# EAGLE board multimax_super (EAGLE 6.0)

Size 99.06 x 81.28 mm. Coordinates in mm from the lower left corner, seen from the top.
Outline: 0,81.27 99.06,81.28 99.06,0 81.28,0
Outline: 0,81.27 0,0 81.28,0
Outline: 0,81.27 0,81.28 81.28,81.28 81.28,0
Copper layers (1*16): Top 0.035mm / dielectric 1.5mm / Bottom 0.035mm
Design rules: minimum track width 10mil, minimum drill 24mil, track to track 8mil, track to pad 8mil, pad to pad 8mil, via to via 8mil, smd to smd 8mil, copper to edge 40mil, drill to drill 8mil, minimum pad ring 10mil, minimum via ring 8mil, stop-mask expansion 4mil, vias tented up to drill 0mil, thermal gap 10mil
Holes 3.2 mm at 5.08,5.08 5.08,76.2 76.2,5.08 76.2,76.2

## Footprints (pad centres in the part's own frame; a part is rotated, then mirrored left to right if it is on the bottom)
LED3MM = drill 0.813 pad 1.88: A -1.27,0; K 1.27,0
CAP-PTH-SMALL-KIT = drill 1.016 pad 2.032: 1 -1.397,0; 2 1.397,0
1X01 = drill 1.016 pad 1.88: 1 0,0
TQFP32-08 = smd 1.27 x 0.559: 1 -4.293,2.8; 2 -4.293,2; 3 -4.293,1.2; 4 -4.293,0.4; 5 -4.293,-0.4; 6 -4.293,-1.2; 7 -4.293,-2; 8 -4.293,-2.8; 17 4.293,-2.8; 18 4.293,-2; 19 4.293,-1.2; 20 4.293,-0.4; 21 4.293,0.4; 22 4.293,1.2; 23 4.293,2; 24 4.293,2.8 | smd 0.559 x 1.27: 9 -2.8,-4.293; 10 -2,-4.293; 11 -1.2,-4.293; 12 -0.4,-4.293; 13 0.4,-4.293; 14 1.2,-4.293; 15 2,-4.293; 16 2.8,-4.293; 25 2.8,4.293; 26 2,4.293; 27 1.2,4.293; 28 0.4,4.293; 29 -0.4,4.293; 30 -1.2,4.293; 31 -2,4.293; 32 -2.8,4.293
2X3-NS = drill 1.016 pad 1.88 square: 1 -2.54,-1.27 | drill 1.016 pad 1.88 octagon: 2 -2.54,1.27; 3 0,-1.27; 4 0,1.27; 5 2.54,-1.27; 6 2.54,1.27
1X04 = drill 1.016 pad 1.88 square: 1 0,0 | drill 1.016 pad 1.88: 2 2.54,0; 3 5.08,0; 4 7.62,0
1X17 = drill 1.016 pad 1.88: 1 0,0; 2 2.54,0; 3 5.08,0; 4 7.62,0; 5 10.16,0; 6 12.7,0; 7 15.24,0; 8 17.78,0; 9 20.32,0; 10 22.86,0; 11 25.4,0; 12 27.94,0; 13 30.48,0; 14 33.02,0; 15 35.56,0; 16 38.1,0; 17 40.64,0
R-7 = drill 0.6 pad 1.27: P$1 -3.25,0; P$2 3.25,0
D-7.5 = drill 0.813: A 2.81,0; C -3,0
USB-MINIB = smd 2.5 x 0.5: D+ 2.5,0; D- 2.5,0.8; GND 2.5,-1.6; ID 2.5,-0.8; VBUS 2.5,1.6 | smd 2.5 x 2: MTN1 -3,4.5; MTN2 2.5,4.5; MTN3 -3,-4.5; MTN4 2.5,-4.5 | hole 0.9: 0,2.2; 0,-2.2
NICHICON_10X30 = drill 1.2 pad 2.54 octagon: P$1 3.23,-1.75 | drill 1.2 pad 2.54: P$2 8.77,-1.75
SWITCH2 = drill 0.6: 1 -0.02,1.94; 2 -0.02,-0.06; 3 -0.02,-2.06 | drill 1.2 square: C1 -0.02,4.19; C2 -0.02,-4.31

## Placement (x,y rotation side)
00  [LED3MM]  2.54,2.54 45 top
0A  [LED3MM]  53.34,2.54 45 top
0B  [LED3MM]  58.42,2.54 45 top
0C  [LED3MM]  63.5,2.54 45 top
0D  [LED3MM]  68.58,2.54 45 top
0E  [LED3MM]  73.66,2.54 45 top
0F  [LED3MM]  78.74,2.54 45 top
01  [LED3MM]  7.62,2.54 45 top
1A  [LED3MM]  53.34,7.62 45 top
1B  [LED3MM]  58.42,7.62 45 top
1C  [LED3MM]  63.5,7.62 45 top
1D  [LED3MM]  68.58,7.62 45 top
1E  [LED3MM]  73.66,7.62 45 top
1F  [LED3MM]  78.74,7.62 45 top
02  [LED3MM]  12.7,2.54 45 top
2A  [LED3MM]  53.34,12.7 45 top
2B  [LED3MM]  58.42,12.7 45 top
2C  [LED3MM]  63.5,12.7 45 top
2D  [LED3MM]  68.58,12.7 45 top
2E  [LED3MM]  73.66,12.7 45 top
2F  [LED3MM]  78.74,12.7 45 top
03  [LED3MM]  17.78,2.54 45 top
3A  [LED3MM]  53.34,17.78 45 top
3B  [LED3MM]  58.42,17.78 45 top
3C  [LED3MM]  63.5,17.78 45 top
3D  [LED3MM]  68.58,17.78 45 top
3E  [LED3MM]  73.66,17.78 45 top
3F  [LED3MM]  78.74,17.78 45 top
04  [LED3MM]  22.86,2.54 45 top
4A  [LED3MM]  53.34,22.86 45 top
4B  [LED3MM]  58.42,22.86 45 top
4C  [LED3MM]  63.5,22.86 45 top
4D  [LED3MM]  68.58,22.86 45 top
4E  [LED3MM]  73.66,22.86 45 top
4F  [LED3MM]  78.74,22.86 45 top
05  [LED3MM]  27.94,2.54 45 top
5A  [LED3MM]  53.34,27.94 45 top
5B  [LED3MM]  58.42,27.94 45 top
5C  [LED3MM]  63.5,27.94 45 top
5D  [LED3MM]  68.58,27.94 45 top
5E  [LED3MM]  73.66,27.94 45 top
5F  [LED3MM]  78.74,27.94 45 top
06  [LED3MM]  33.02,2.54 45 top
6A  [LED3MM]  53.34,33.02 45 top
6B  [LED3MM]  58.42,33.02 45 top
6C  [LED3MM]  63.5,33.02 45 top
6D  [LED3MM]  68.58,33.02 45 top
6E  [LED3MM]  73.66,33.02 45 top
6F  [LED3MM]  78.74,33.02 45 top
07  [LED3MM]  38.1,2.54 45 top
7A  [LED3MM]  53.34,38.1 45 top
7B  [LED3MM]  58.42,38.1 45 top
7C  [LED3MM]  63.5,38.1 45 top
7D  [LED3MM]  68.58,38.1 45 top
7E  [LED3MM]  73.66,38.1 45 top
7F  [LED3MM]  78.74,38.1 45 top
08  [LED3MM]  43.18,2.54 45 top
8A  [LED3MM]  53.34,43.18 45 top
8B  [LED3MM]  58.42,43.18 45 top
8C  [LED3MM]  63.5,43.18 45 top
8D  [LED3MM]  68.58,43.18 45 top
8E  [LED3MM]  73.66,43.18 45 top
8F  [LED3MM]  78.74,43.18 45 top
09  [LED3MM]  48.26,2.54 45 top
9A  [LED3MM]  53.34,48.26 45 top
9B  [LED3MM]  58.42,48.26 45 top
9C  [LED3MM]  63.5,48.26 45 top
9D  [LED3MM]  68.58,48.26 45 top
9E  [LED3MM]  73.66,48.26 45 top
9F  [LED3MM]  78.74,48.26 45 top
10  [LED3MM]  2.54,7.62 45 top
11  [LED3MM]  7.62,7.62 45 top
12  [LED3MM]  12.7,7.62 45 top
13  [LED3MM]  17.78,7.62 45 top
14  [LED3MM]  22.86,7.62 45 top
15  [LED3MM]  27.94,7.62 45 top
16  [LED3MM]  33.02,7.62 45 top
17  [LED3MM]  38.1,7.62 45 top
18  [LED3MM]  43.18,7.62 45 top
19  [LED3MM]  48.26,7.62 45 top
20  [LED3MM]  2.54,12.7 45 top
21  [LED3MM]  7.62,12.7 45 top
22  [LED3MM]  12.7,12.7 45 top
23  [LED3MM]  17.78,12.7 45 top
24  [LED3MM]  22.86,12.7 45 top
25  [LED3MM]  27.94,12.7 45 top
26  [LED3MM]  33.02,12.7 45 top
27  [LED3MM]  38.1,12.7 45 top
28  [LED3MM]  43.18,12.7 45 top
29  [LED3MM]  48.26,12.7 45 top
30  [LED3MM]  2.54,17.78 45 top
31  [LED3MM]  7.62,17.78 45 top
32  [LED3MM]  12.7,17.78 45 top
33  [LED3MM]  17.78,17.78 45 top
34  [LED3MM]  22.86,17.78 45 top
35  [LED3MM]  27.94,17.78 45 top
36  [LED3MM]  33.02,17.78 45 top
37  [LED3MM]  38.1,17.78 45 top
38  [LED3MM]  43.18,17.78 45 top
39  [LED3MM]  48.26,17.78 45 top
40  [LED3MM]  2.54,22.86 45 top
41  [LED3MM]  7.62,22.86 45 top
42  [LED3MM]  12.7,22.86 45 top
43  [LED3MM]  17.78,22.86 45 top
44  [LED3MM]  22.86,22.86 45 top
45  [LED3MM]  27.94,22.86 45 top
46  [LED3MM]  33.02,22.86 45 top
47  [LED3MM]  38.1,22.86 45 top
48  [LED3MM]  43.18,22.86 45 top
49  [LED3MM]  48.26,22.86 45 top
50  [LED3MM]  2.54,27.94 45 top
51  [LED3MM]  7.62,27.94 45 top
52  [LED3MM]  12.7,27.94 45 top
53  [LED3MM]  17.78,27.94 45 top
54  [LED3MM]  22.86,27.94 45 top
55  [LED3MM]  27.94,27.94 45 top
56  [LED3MM]  33.02,27.94 45 top
57  [LED3MM]  38.1,27.94 45 top
58  [LED3MM]  43.18,27.94 45 top
59  [LED3MM]  48.26,27.94 45 top
60  [LED3MM]  2.54,33.02 45 top
61  [LED3MM]  7.62,33.02 45 top
62  [LED3MM]  12.7,33.02 45 top
63  [LED3MM]  17.78,33.02 45 top
64  [LED3MM]  22.86,33.02 45 top
65  [LED3MM]  27.94,33.02 45 top
66  [LED3MM]  33.02,33.02 45 top
67  [LED3MM]  38.1,33.02 45 top
68  [LED3MM]  43.18,33.02 45 top
69  [LED3MM]  48.26,33.02 45 top
70  [LED3MM]  2.54,38.1 45 top
71  [LED3MM]  7.62,38.1 45 top
72  [LED3MM]  12.7,38.1 45 top
73  [LED3MM]  17.78,38.1 45 top
74  [LED3MM]  22.86,38.1 45 top
75  [LED3MM]  27.94,38.1 45 top
76  [LED3MM]  33.02,38.1 45 top
77  [LED3MM]  38.1,38.1 45 top
78  [LED3MM]  43.18,38.1 45 top
79  [LED3MM]  48.26,38.1 45 top
80  [LED3MM]  2.54,43.18 45 top
81  [LED3MM]  7.62,43.18 45 top
82  [LED3MM]  12.7,43.18 45 top
83  [LED3MM]  17.78,43.18 45 top
84  [LED3MM]  22.86,43.18 45 top
85  [LED3MM]  27.94,43.18 45 top
86  [LED3MM]  33.02,43.18 45 top
87  [LED3MM]  38.1,43.18 45 top
88  [LED3MM]  43.18,43.18 45 top
89  [LED3MM]  48.26,43.18 45 top
90  [LED3MM]  2.54,48.26 45 top
91  [LED3MM]  7.62,48.26 45 top
92  [LED3MM]  12.7,48.26 45 top
93  [LED3MM]  17.78,48.26 45 top
94  [LED3MM]  22.86,48.26 45 top
95  [LED3MM]  27.94,48.26 45 top
96  [LED3MM]  33.02,48.26 45 top
97  [LED3MM]  38.1,48.26 45 top
98  [LED3MM]  43.18,48.26 45 top
99  [LED3MM]  48.26,48.26 45 top
A0  [LED3MM]  2.54,53.34 45 top
A1  [LED3MM]  7.62,53.34 45 top
A2  [LED3MM]  12.7,53.34 45 top
A3  [LED3MM]  17.78,53.34 45 top
A4  [LED3MM]  22.86,53.34 45 top
A5  [LED3MM]  27.94,53.34 45 top
A6  [LED3MM]  33.02,53.34 45 top
A7  [LED3MM]  38.1,53.34 45 top
A8  [LED3MM]  43.18,53.34 45 top
A9  [LED3MM]  48.26,53.34 45 top
AA  [LED3MM]  53.34,53.34 45 top
AB  [LED3MM]  58.42,53.34 45 top
AC  [LED3MM]  63.5,53.34 45 top
AD  [LED3MM]  68.58,53.34 45 top
AE  [LED3MM]  73.66,53.34 45 top
AF  [LED3MM]  78.74,53.34 45 top
B0  [LED3MM]  2.54,58.42 45 top
B1  [LED3MM]  7.62,58.42 45 top
B2  [LED3MM]  12.7,58.42 45 top
B3  [LED3MM]  17.78,58.42 45 top
B4  [LED3MM]  22.86,58.42 45 top
B5  [LED3MM]  27.94,58.42 45 top
B6  [LED3MM]  33.02,58.42 45 top
B7  [LED3MM]  38.1,58.42 45 top
B8  [LED3MM]  43.18,58.42 45 top
B9  [LED3MM]  48.26,58.42 45 top
BA  [LED3MM]  53.34,58.42 45 top
BB  [LED3MM]  58.42,58.42 45 top
BC  [LED3MM]  63.5,58.42 45 top
BD  [LED3MM]  68.58,58.42 45 top
BE  [LED3MM]  73.66,58.42 45 top
BF  [LED3MM]  78.74,58.42 45 top
C0  [LED3MM]  2.54,63.5 45 top
C1  [LED3MM]  7.62,63.5 45 top
C2  [LED3MM]  12.7,63.5 45 top
C3  [LED3MM]  17.78,63.5 45 top
C4  [LED3MM]  22.86,63.5 45 top
C5  [LED3MM]  27.94,63.5 45 top
C6  [LED3MM]  33.02,63.5 45 top
C7  [LED3MM]  38.1,63.5 45 top
C8  [LED3MM]  43.18,63.5 45 top
C9  [LED3MM]  48.26,63.5 45 top
CA  [LED3MM]  53.34,63.5 45 top
CB  [LED3MM]  58.42,63.5 45 top
CC  [LED3MM]  63.5,63.5 45 top
CD  [LED3MM]  68.58,63.5 45 top
CE  [LED3MM]  73.66,63.5 45 top
CF  [LED3MM]  78.74,63.5 45 top
CP1  [CAP-PTH-SMALL-KIT]  -27.94,55.88 0 top  (outside the outline)
CP2  [CAP-PTH-SMALL-KIT]  -34.29,55.88 0 top  (outside the outline)
CP3  [CAP-PTH-SMALL-KIT]  -40.64,55.88 0 top  (outside the outline)
CP4  [CAP-PTH-SMALL-KIT]  -46.99,55.88 0 top  (outside the outline)
D0  [LED3MM]  2.54,68.58 45 top
D1  [LED3MM]  7.62,68.58 45 top
D2  [LED3MM]  12.7,68.58 45 top
D3  [LED3MM]  17.78,68.58 45 top
D4  [LED3MM]  22.86,68.58 45 top
D5  [LED3MM]  27.94,68.58 45 top
D6  [LED3MM]  33.02,68.58 45 top
D7  [LED3MM]  38.1,68.58 45 top
D8  [LED3MM]  43.18,68.58 45 top
D9  [LED3MM]  48.26,68.58 45 top
DA  [LED3MM]  53.34,68.58 45 top
DB  [LED3MM]  58.42,68.58 45 top
DC  [LED3MM]  63.5,68.58 45 top
DD  [LED3MM]  68.58,68.58 45 top
DE  [LED3MM]  73.66,68.58 45 top
DF  [LED3MM]  78.74,68.58 45 top
E0  [LED3MM]  2.54,73.66 45 top
E1  [LED3MM]  7.62,73.66 45 top
E2  [LED3MM]  12.7,73.66 45 top
E3  [LED3MM]  17.78,73.66 45 top
E4  [LED3MM]  22.86,73.66 45 top
E5  [LED3MM]  27.94,73.66 45 top
E6  [LED3MM]  33.02,73.66 45 top
E7  [LED3MM]  38.1,73.66 45 top
E8  [LED3MM]  43.18,73.66 45 top
E9  [LED3MM]  48.26,73.66 45 top
EA  [LED3MM]  53.34,73.66 45 top
EB  [LED3MM]  58.42,73.66 45 top
EC  [LED3MM]  63.5,73.66 45 top
ED  [LED3MM]  68.58,73.66 45 top
EE  [LED3MM]  73.66,73.66 45 top
EF  [LED3MM]  78.74,73.66 45 top
F0  [LED3MM]  2.54,78.74 45 top
F1  [LED3MM]  7.62,78.74 45 top
F2  [LED3MM]  12.7,78.74 45 top
F3  [LED3MM]  17.78,78.74 45 top
F4  [LED3MM]  22.86,78.74 45 top
F5  [LED3MM]  27.94,78.74 45 top
F6  [LED3MM]  33.02,78.74 45 top
F7  [LED3MM]  38.1,78.74 45 top
F8  [LED3MM]  43.18,78.74 45 top
F9  [LED3MM]  48.26,78.74 45 top
FA  [LED3MM]  53.34,78.74 45 top
FB  [LED3MM]  58.42,78.74 45 top
FC  [LED3MM]  63.5,78.74 45 top
FD  [LED3MM]  68.58,78.74 45 top
FE  [LED3MM]  73.66,78.74 45 top
FF  [LED3MM]  78.74,78.74 45 top
H0  [1X01]  20.32,5.08 0 top
H1  [1X01]  22.86,5.08 0 top
H2  [1X01]  25.4,5.08 0 top
H3  [1X01]  27.94,5.08 0 top
H4  [1X01]  30.48,5.08 0 top
H5  [1X01]  33.02,5.08 0 top
H6  [1X01]  35.56,5.08 0 top
H7  [1X01]  38.1,5.08 0 top
H8  [1X01]  40.64,5.08 0 top
H9  [1X01]  43.18,5.08 0 top
H10  [1X01]  45.72,5.08 0 top
H11  [1X01]  48.26,5.08 0 top
H12  [1X01]  50.8,5.08 0 top
H13  [1X01]  53.34,5.08 0 top
H14  [1X01]  55.88,5.08 0 top
H15  [1X01]  58.42,5.08 0 top
H16  [1X01]  60.96,5.08 0 top
IC1  MEGA8-AI  [TQFP32-08]  -29.21,39.37 0 top  (outside the outline)
J1  AVR_SPI_PRG_6NS  [2X3-NS]  -53.34,39.37 0 top  (outside the outline)
JP1  [1X04]  -22.86,55.88 0 top  (outside the outline)
U$1  M17  [1X17]  -55.88,50.8 0 top  (outside the outline)
U$2  R-7  [R-7]  -54.61,55.88 0 top  (outside the outline)
U$3  R-7  [R-7]  -63.5,55.88 0 top  (outside the outline)
U$4  R-7  [R-7]  -17.78,60.96 0 top  (outside the outline)
U$5  D-6  [D-7.5]  -62.23,60.96 0 top  (outside the outline)
U$6  D-6  [D-7.5]  -17.78,63.5 0 top  (outside the outline)
U$7  R-7  [R-7]  -26.67,60.96 0 top  (outside the outline)
U$8  USB-MINIB-5PIN  [USB-MINIB]  -17.78,40.64 0 top  (outside the outline)
U$9  NICHICON_12F  [NICHICON_10X30]  81.28,3.81 0 top
U$10  NICHICON_12F  [NICHICON_10X30]  -39.37,3.81 0 top  (outside the outline)
U$11  NICHICON_12F  [NICHICON_10X30]  -53.34,3.81 0 top  (outside the outline)
U$12  NICHICON_12F  [NICHICON_10X30]  -67.31,3.81 0 top  (outside the outline)
U$13  R-7  [R-7]  -35.56,60.96 0 top  (outside the outline)
U$14  SPST_PTH  [SWITCH2]  -36.83,39.37 0 top  (outside the outline)
U$15  D-6  [D-7.5]  -26.67,63.5 0 top  (outside the outline)
U$16  D-6  [D-7.5]  -35.56,63.5 0 top  (outside the outline)
U$17  R-7  [R-7]  -44.45,60.96 0 top  (outside the outline)
U$18  R-7  [R-7]  -53.34,60.96 0 top  (outside the outline)
U$19  D-6  [D-7.5]  -44.45,63.5 0 top  (outside the outline)
U$20  D-6  [D-7.5]  -53.34,63.5 0 top  (outside the outline)

## Library data of the parts
00 0A 0B 0C 0D 0E 0F 01 1A 1B 1C 1D 1E 1F 02 2A 2B 2C 2D 2E 2F 03 3A 3B 3C 3D 3E 3F 04 4A 4B 4C 4D 4E 4F 05 5A 5B 5C 5D 5E 5F 06 6A 6B 6C 6D 6E 6F 07 7A 7B 7C 7D 7E 7F 08 8A 8B 8C 8D 8E 8F 09 9A 9B 9C 9D 9E 9F 10-99 A0 A1-A9 AA AB AC AD AE AF B0 B1-B9 BA BB BC BD BE BF C0 C1-C9 CA CB CC CD CE CF D0 D1-D9 DA DB DC DD DE DF E0 E1-E9 EA EB EC ED EE EF F0 F1-F9 FA FB FC FD FE FF = SparkFun-LED
CP1-CP4 = SparkFun-Capacitors
H0 H1-H16 J1 JP1 U$1 U$8 = SparkFun-Connectors
IC1 = atmel; MPN: ATMEGA8-16AU; OC_FARNELL: 9171371; OC_NEWARK: 73M8863
U$2-U$7 U$9-U$20 = Mrule

## Nets
D: 00.A 11.A 22.A 33.A 44.A 55.A 66.A 77.A 88.A 99.A AA.A BB.A CC.A DD.A EE.A FF.A H16.1
GND: CP1.2 CP2.2 CP3.2 CP4.2 IC1.3 IC1.5 IC1.21 J1.6 JP1.4 U$8.GND U$17.P$1
N$1: IC1.31 JP1.3
N$2: IC1.30 JP1.2
N$3: IC1.29 J1.5 U$2.P$2
N$4: IC1.17 J1.3 U$1.15
N$5: IC1.16 J1.1 U$1.14
N$6: IC1.15 J1.4 U$1.13
N$7: IC1.8 U$1.17
N$8: IC1.1 U$4.P$1
N$9: IC1.32 U$3.P$1
N$10: IC1.7 U$1.16
N$11: IC1.14 U$1.12
N$12: IC1.13 U$1.11
N$13: IC1.12 U$1.10
N$14: IC1.11 U$1.9
N$15: IC1.10 U$1.8
N$16: IC1.9 U$1.7
N$17: IC1.2 U$1.6
N$18: IC1.28 U$1.5
N$19: IC1.27 U$1.4
N$20: IC1.26 U$1.3
N$21: IC1.25 U$1.2
N$22: IC1.24 U$1.1
N$23: U$5.C U$8.D+
N$24: U$6.A U$8.D-
N$25: U$3.P$2 U$5.A
N$26: U$4.P$2 U$6.C U$7.P$1
N$27: U$9.P$2 U$10.P$2 U$11.P$2 U$12.P$2 U$14.3 U$18.P$1
N$28: U$15.A U$16.A U$17.P$2 U$19.A U$20.A
N$29: U$14.2 U$16.C U$18.P$2
N$30: U$9.P$1 U$10.P$1 U$11.P$1 U$12.P$1
N$31: U$8.VBUS U$13.P$2
N$32: U$13.P$1 U$15.C U$19.C U$20.C
S0: 00.K 0A.A 0B.A 0C.A 0D.A 0E.A 0F.A 01.A 02.A 03.A 04.A 05.A 06.A 07.A 08.A 09.A 10.K 20.K 30.K 40.K 50.K 60.K 70.K 80.K 90.K A0.K B0.K C0.K D0.K E0.K F0.K H0.1
S1: 01.K 1A.A 1B.A 1C.A 1D.A 1E.A 1F.A 10.A 11.K 12.A 13.A 14.A 15.A 16.A 17.A 18.A 19.A 21.K 31.K 41.K 51.K 61.K 71.K 81.K 91.K A1.K B1.K C1.K D1.K E1.K F1.K H1.1
S2: 02.K 2A.A 2B.A 2C.A 2D.A 2E.A 2F.A 12.K 20.A 21.A 22.K 23.A 24.A 25.A 26.A 27.A 28.A 29.A 32.K 42.K 52.K 62.K 72.K 82.K 92.K A2.K B2.K C2.K D2.K E2.K F2.K H2.1
S3: 03.K 3A.A 3B.A 3C.A 3D.A 3E.A 3F.A 13.K 23.K 30.A 31.A 32.A 33.K 34.A 35.A 36.A 37.A 38.A 39.A 43.K 53.K 63.K 73.K 83.K 93.K A3.K B3.K C3.K D3.K E3.K F3.K H3.1
S4: 04.K 4A.A 4B.A 4C.A 4D.A 4E.A 4F.A 14.K 24.K 34.K 40.A 41.A 42.A 43.A 44.K 45.A 46.A 47.A 48.A 49.A 54.K 64.K 74.K 84.K 94.K A4.K B4.K C4.K D4.K E4.K F4.K H4.1
S5: 05.K 5A.A 5B.A 5C.A 5D.A 5E.A 5F.A 15.K 25.K 35.K 45.K 50.A 51.A 52.A 53.A 54.A 55.K 56.A 57.A 58.A 59.A 65.K 75.K 85.K 95.K A5.K B5.K C5.K D5.K E5.K F5.K H5.1
S6: 06.K 6A.A 6B.A 6C.A 6D.A 6E.A 6F.A 16.K 26.K 36.K 46.K 56.K 60.A 61.A 62.A 63.A 64.A 65.A 66.K 67.A 68.A 69.A 76.K 86.K 96.K A6.K B6.K C6.K D6.K E6.K F6.K H6.1
S7: 07.K 7A.A 7B.A 7C.A 7D.A 7E.A 7F.A 17.K 27.K 37.K 47.K 57.K 67.K 70.A 71.A 72.A 73.A 74.A 75.A 76.A 77.K 78.A 79.A 87.K 97.K A7.K B7.K C7.K D7.K E7.K F7.K H7.1
S8: 08.K 8A.A 8B.A 8C.A 8D.A 8E.A 8F.A 18.K 28.K 38.K 48.K 58.K 68.K 78.K 80.A 81.A 82.A 83.A 84.A 85.A 86.A 87.A 88.K 89.A 98.K A8.K B8.K C8.K D8.K E8.K F8.K H8.1
S9: 09.K 9A.A 9B.A 9C.A 9D.A 9E.A 9F.A 19.K 29.K 39.K 49.K 59.K 69.K 79.K 89.K 90.A 91.A 92.A 93.A 94.A 95.A 96.A 97.A 98.A 99.K A9.K B9.K C9.K D9.K E9.K F9.K H9.1
S10: 0A.K 1A.K 2A.K 3A.K 4A.K 5A.K 6A.K 7A.K 8A.K 9A.K A0.A A1.A A2.A A3.A A4.A A5.A A6.A A7.A A8.A A9.A AA.K AB.A AC.A AD.A AE.A AF.A BA.K CA.K DA.K EA.K FA.K H10.1
S11: 0B.K 1B.K 2B.K 3B.K 4B.K 5B.K 6B.K 7B.K 8B.K 9B.K AB.K B0.A B1.A B2.A B3.A B4.A B5.A B6.A B7.A B8.A B9.A BA.A BB.K BC.A BD.A BE.A BF.A CB.K DB.K EB.K FB.K H11.1
S12: 0C.K 1C.K 2C.K 3C.K 4C.K 5C.K 6C.K 7C.K 8C.K 9C.K AC.K BC.K C0.A C1.A C2.A C3.A C4.A C5.A C6.A C7.A C8.A C9.A CA.A CB.A CC.K CD.A CE.A CF.A DC.K EC.K FC.K H12.1
S13: 0D.K 1D.K 2D.K 3D.K 4D.K 5D.K 6D.K 7D.K 8D.K 9D.K AD.K BD.K CD.K D0.A D1.A D2.A D3.A D4.A D5.A D6.A D7.A D8.A D9.A DA.A DB.A DC.A DD.K DE.A DF.A ED.K FD.K H13.1
S14: 0E.K 1E.K 2E.K 3E.K 4E.K 5E.K 6E.K 7E.K 8E.K 9E.K AE.K BE.K CE.K DE.K E0.A E1.A E2.A E3.A E4.A E5.A E6.A E7.A E8.A E9.A EA.A EB.A EC.A ED.A EE.K EF.A FE.K H14.1
S15: 0F.K 1F.K 2F.K 3F.K 4F.K 5F.K 6F.K 7F.K 8F.K 9F.K AF.K BF.K CF.K DF.K EF.K F0.A F1.A F2.A F3.A F4.A F5.A F6.A F7.A F8.A F9.A FA.A FB.A FC.A FD.A FE.A FF.K H15.1
VCC: CP1.1 CP2.1 CP3.1 CP4.1 IC1.4 IC1.6 IC1.18 IC1.20 J1.2 JP1.1 U$2.P$1 U$7.P$2 U$14.1

## Tracks (layer width: path | path; a pad name or v marks a point on that pad's centre or on a via)
D  (16 unrouted)
GND  (10 unrouted)
N$1  (1 unrouted)
N$2  (1 unrouted)
N$3  (2 unrouted)
N$4  (2 unrouted)
N$5  (2 unrouted)
N$6  (2 unrouted)
N$7  (1 unrouted)
N$8  (1 unrouted)
N$9  (1 unrouted)
N$10  (1 unrouted)
N$11  (1 unrouted)
N$12  (1 unrouted)
N$13  (1 unrouted)
N$14  (1 unrouted)
N$15  (1 unrouted)
N$16  (1 unrouted)
N$17  (1 unrouted)
N$18  (1 unrouted)
N$19  (1 unrouted)
N$20  (1 unrouted)
N$21  (1 unrouted)
N$22  (1 unrouted)
N$23  (1 unrouted)
N$24  (1 unrouted)
N$25  (1 unrouted)
N$26  (2 unrouted)
N$27  (5 unrouted)
N$28  (4 unrouted)
N$29  (2 unrouted)
N$30  (3 unrouted)
N$31  (1 unrouted)
N$32  (3 unrouted)
S0  (31 unrouted)
S1  (31 unrouted)
S2  (31 unrouted)
S3  (31 unrouted)
S4  (31 unrouted)
S5  (31 unrouted)
S6  (31 unrouted)
S7  (31 unrouted)
S8  (31 unrouted)
S9  (31 unrouted)
S10  (31 unrouted)
S11  (31 unrouted)
S12  (31 unrouted)
S13  (31 unrouted)
S14  (31 unrouted)
S15  (31 unrouted)
VCC  (12 unrouted)